# Altium PCB CAN.PcbDoc
Units mil, origin at the board's own origin, x right, y up, seen from the top; angles counter-clockwise.
Board outline 2980 x 2445.03 mil, 2 copper layers (Top Layer, Bottom Layer), stack 61.756 mil thick; 48 components, 33 nets, 223 pads, 20 vias.
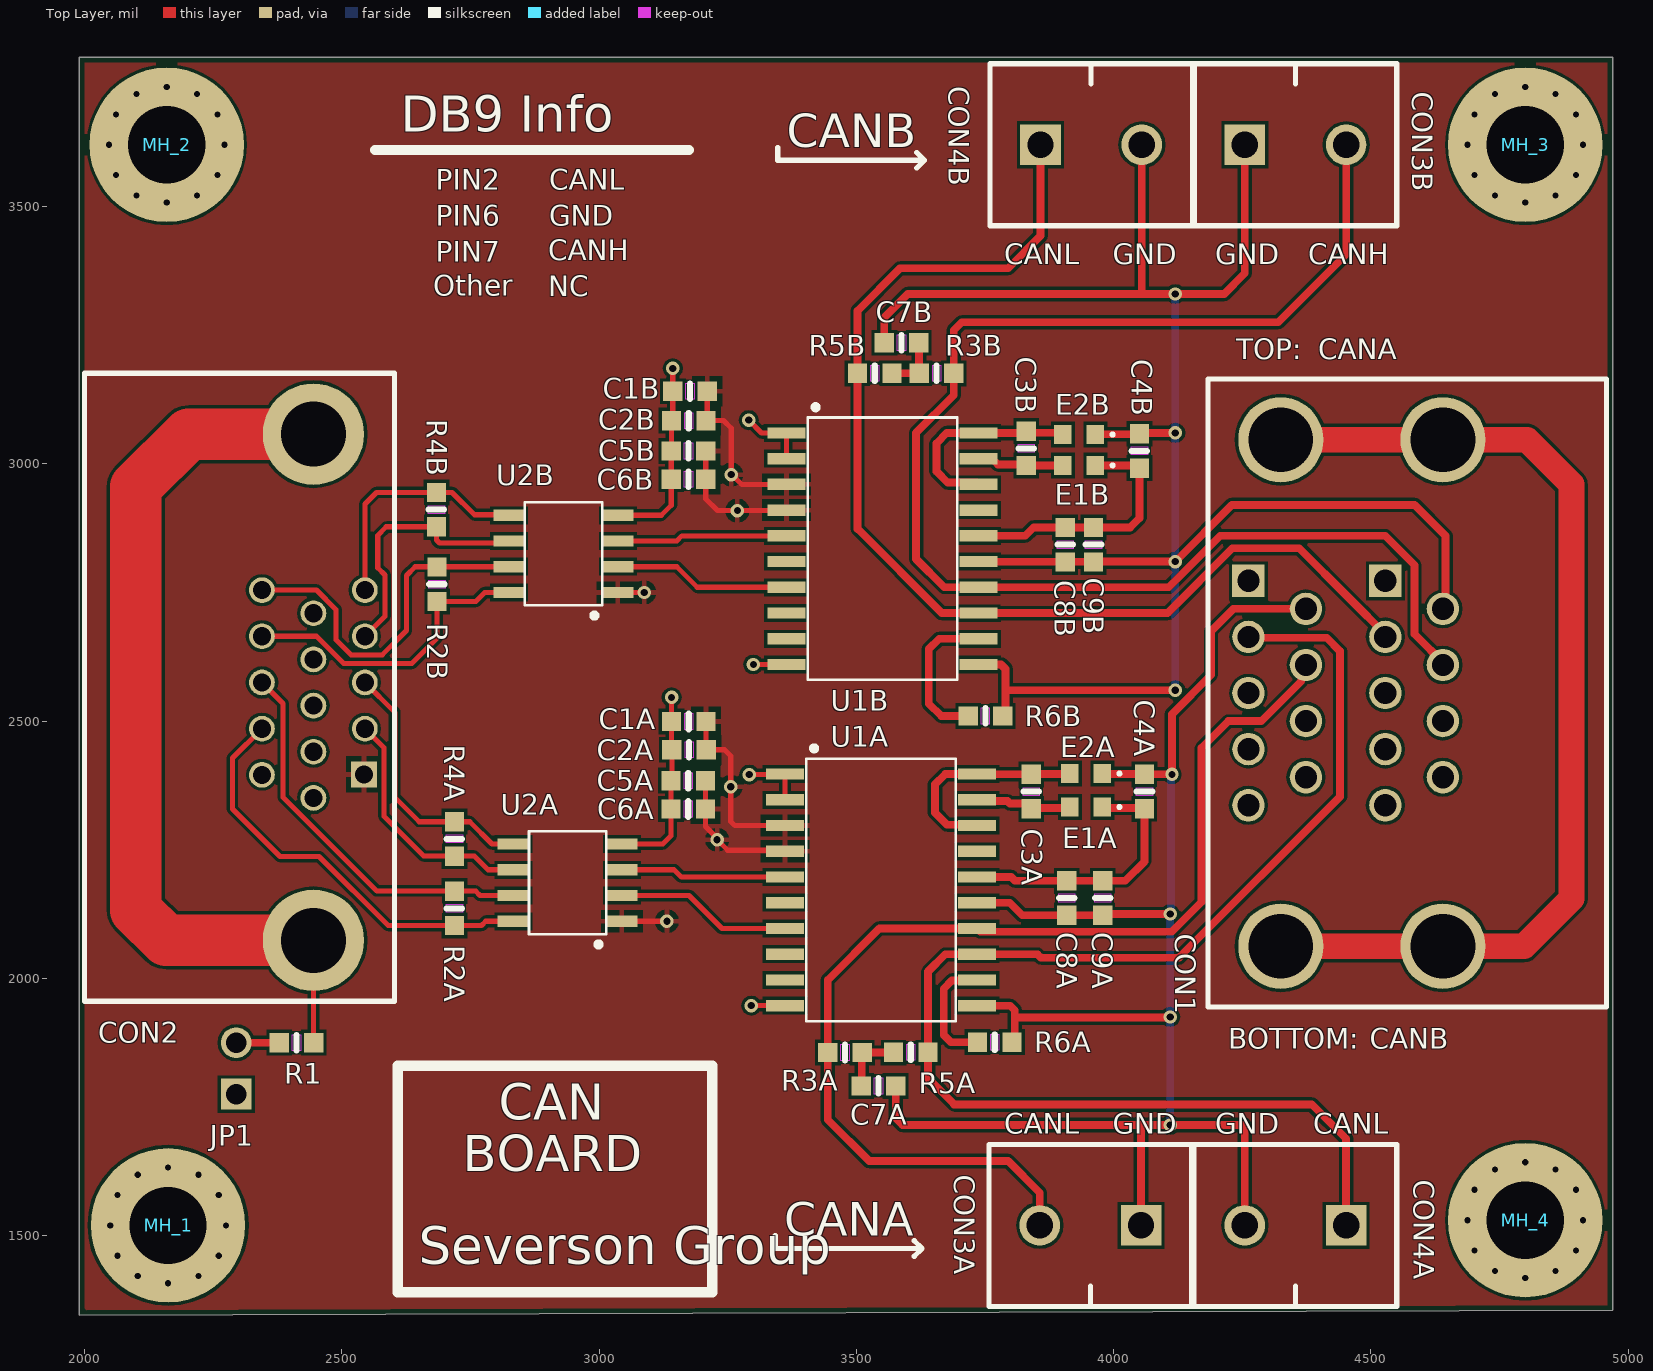
[diagram p0: Top Layer view]
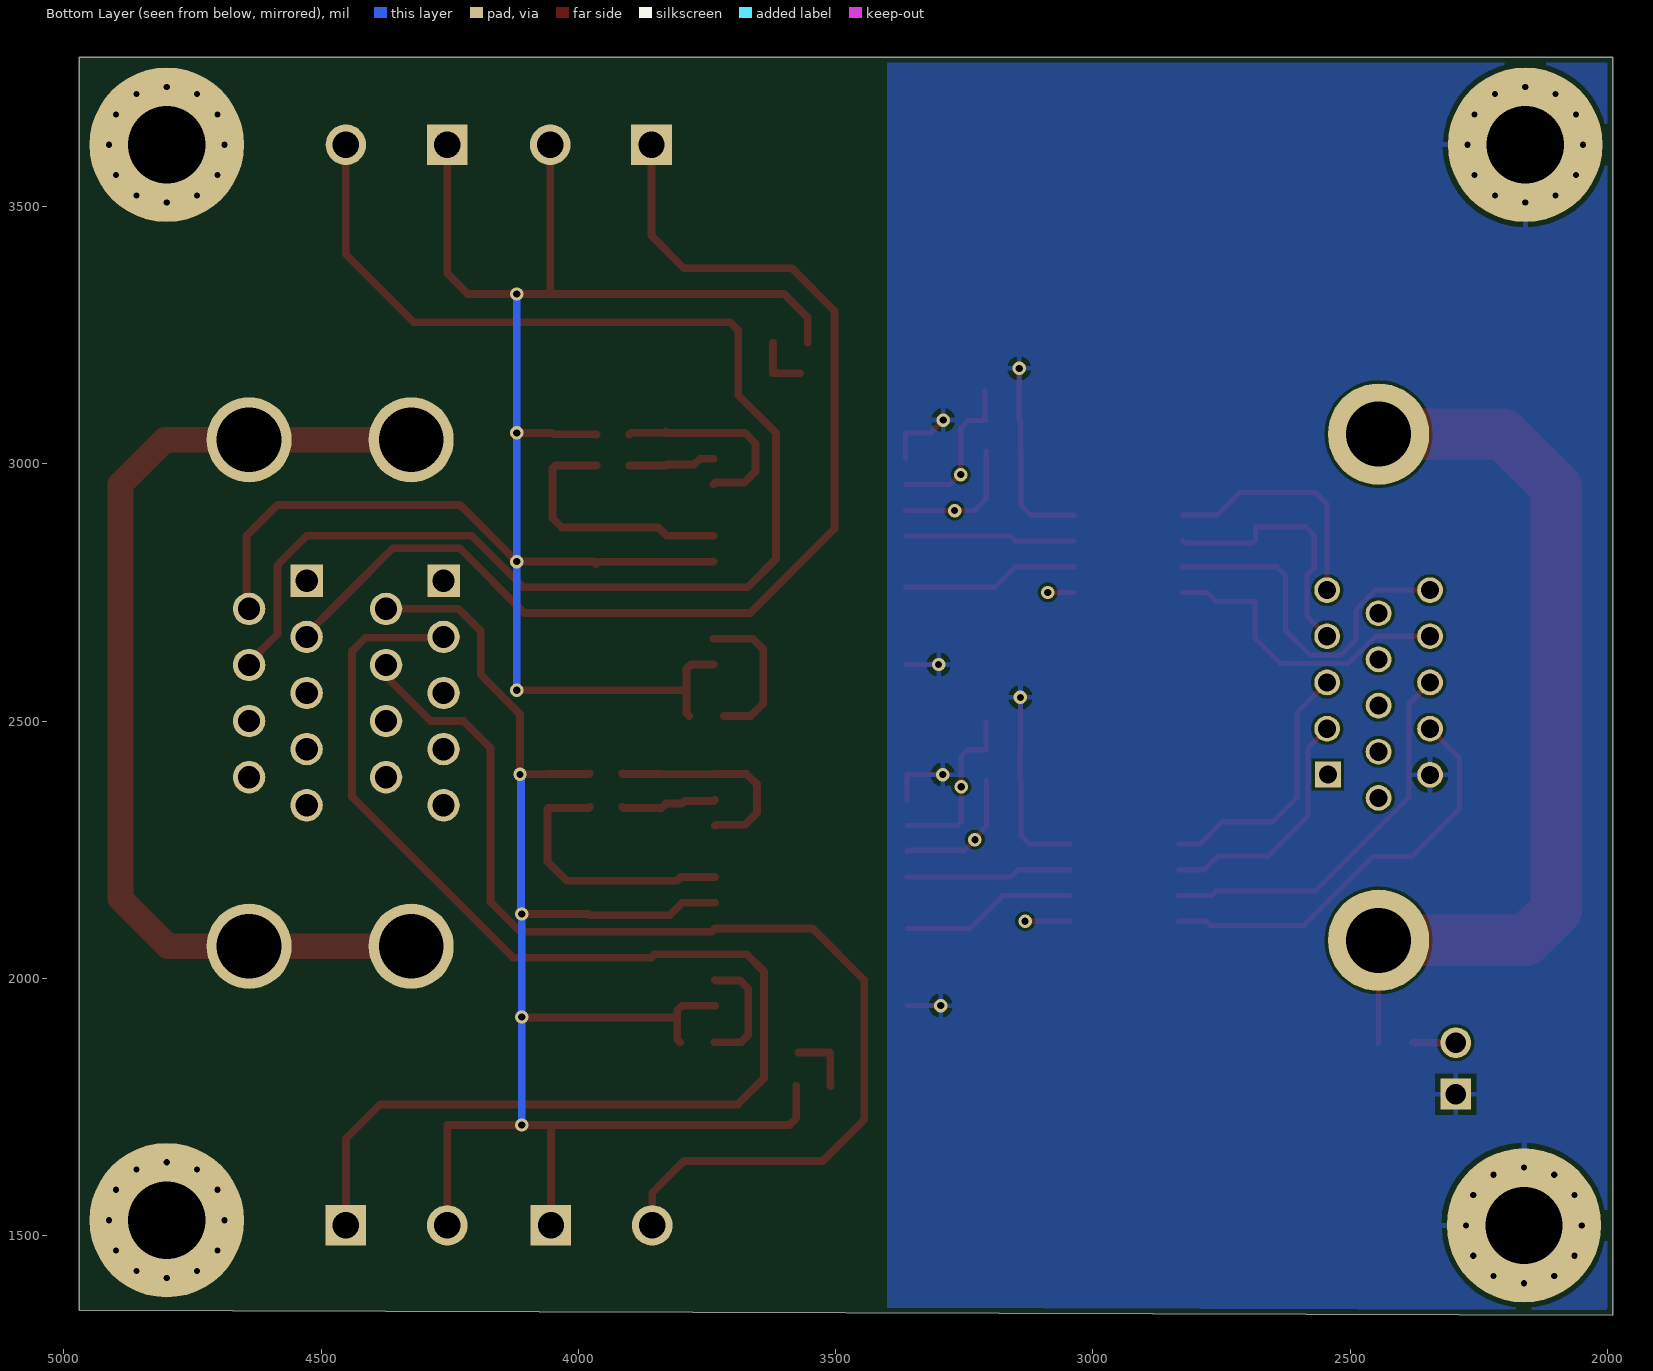
[diagram p1: Bottom Layer view, seen from below]
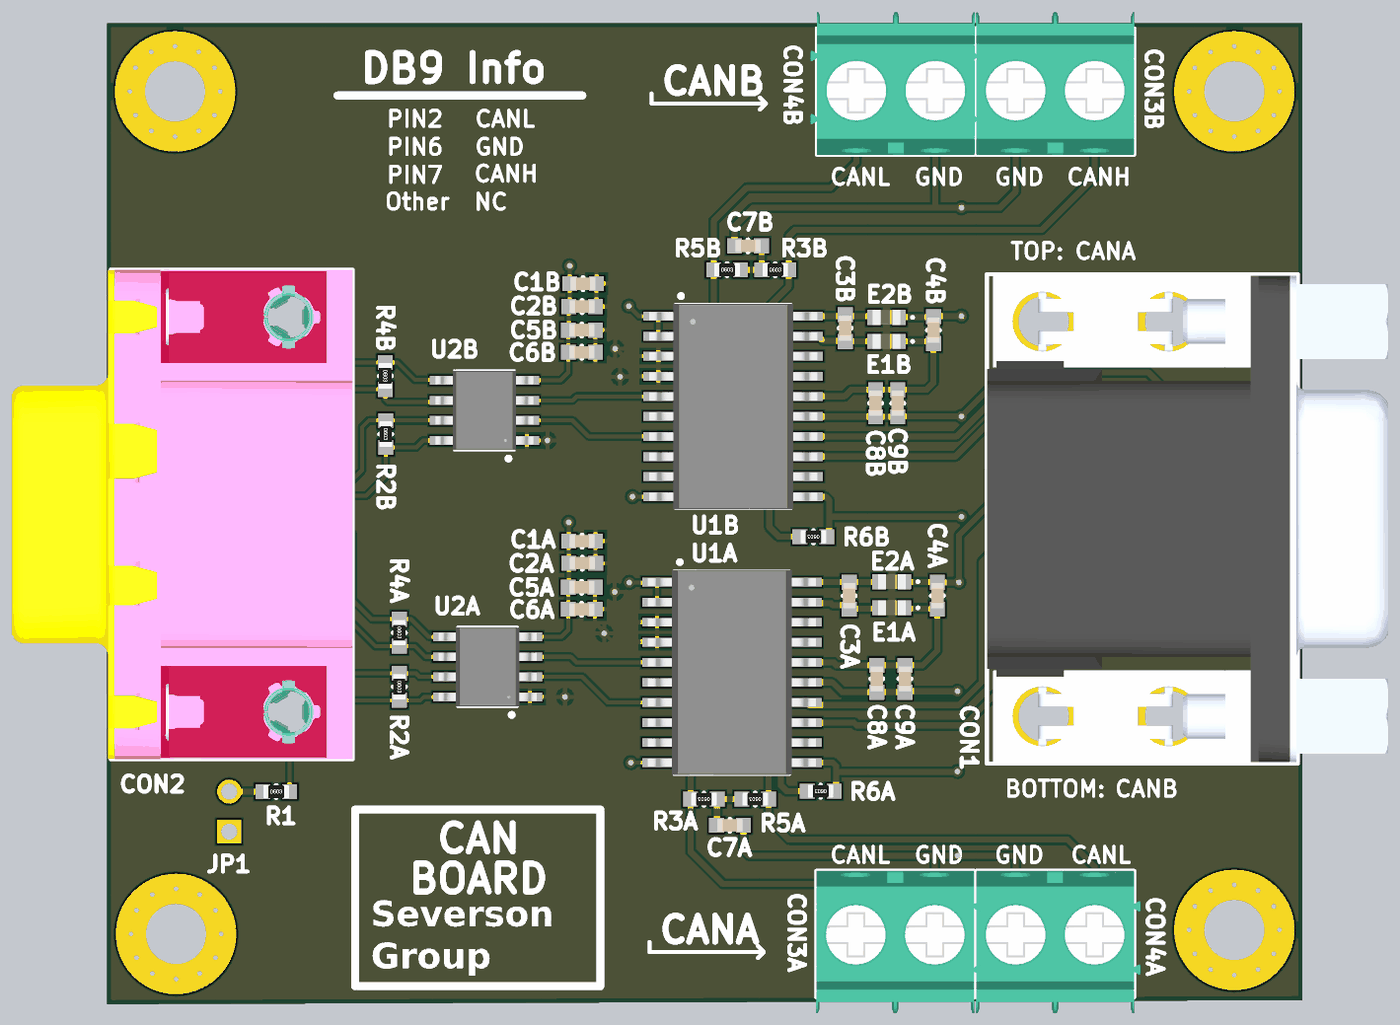
[diagram p2: 3D render of the assembled board from above, using the file's embedded part models]

## Layer stack, top to bottom
Top Solder: solder mask 1, SM-001, Dk 4
Top Layer: signal copper 1.378
Dielectric 1: core 59, Core-043, Dk 4.3
Bottom Layer: signal copper 1.378
Bottom Solder: solder mask 1, SM-001, Dk 4

## Board outline
1990,1344.97 1990,3790 4960,3790 4970,3790 4970,1354.97

## Design rules (kind name [scope] priority, off if disabled: settings)
BoardOutlineClearance [All] p1: gap=10 ignorepadtopadclearanceinfootprint=FALSE
Clearance Clearance_1 [InNamedPolygon('NONET_L02_P007')] p1: gap=10 ignorepadtopadclearanceinfootprint=FALSE except(0: Arc-Hole Track-Hole SMDPad-Hole THPad-Hole Via-Hole Fill-Hole Poly-Hole Region-Hole Text-Hole)
Clearance [All] p2: gap=6 ignorepadtopadclearanceinfootprint=FALSE
Height [All] p1: minheight=0 maxheight=5000 prefheight=500
HoleSize [All] p1: absolutevalues=TRUE maxlimit=250 minlimit=14 maxpercent=80.000 minpercent=20.000
MinimumSolderMaskSliver [All] p1: minsoldermaskwidth=6
PolygonConnect [All] p1: connectstyle=Relief reliefconductorwidth=10 reliefentries=4 polygonreliefangle="90 Angle" airgapwidth=10
RoutingVias [All] p1: holewidth=14 width=26 viastyle="Through Hole" minholewidth=12 minwidth=18 maxholewidth=150 maxwidth=200
SolderMaskExpansion [All] p1: expansion=4 istentingtop=FALSE
Width [All] p1: maxlimit=100 minlimit=6 preferedwidth=6
27 further rules are at their usual default settings.

## Classes and differential pairs
component class U_BackPage: MH_1 MH_2 MH_3 MH_4 SCREW1 SCREW2 SCREW3 SCREW4 STANDOFF1 STANDOFF2 STANDOFF3 STANDOFF4
channel class CAN_Transceiver: CAN_TransceiverA CAN_TransceiverB
component class CAN_TransceiverB: C1B C2B C3B C4B C5B C6B C7B C8B C9B CON3B CON4B E1B E2B R2B R3B R4B R5B R6B U1B U2B
component class CAN_TransceiverA: C1A C2A C3A C4A C5A C6A C7A C8A C9A CON3A CON4A E1A E2A R2A R3A R4A R5A R6A U1A U2A
component class CAN: CON1 CON2 JP1 R1

## Components (designator, comment, footprint, x,y, rotation, side; value= is the part's Value field where it differs from the comment)
C1A "Capacitor" 0603_CAP 3174.46,2499.25 r0 top value=10uF (schematic designator C1)
C1B "Capacitor" 0603_CAP 3176.87,3141 r0 top value=10uF (schematic designator C1)
C2A "Capacitor" 0603_CAP 3175,2444.25 r0 top value=0.1uF (schematic designator C2)
C2B "Capacitor" 0603_CAP 3174.49,3083.89 r0 top value=0.1uF (schematic designator C2)
C3A "Capacitor" 0603_CAP 3840,2363 r270 top value=0.1uF (schematic designator C3)
C3B "Capacitor" 0603_CAP 3830.25,3030 r270 top value=0.1uF (schematic designator C3)
C4A "Capacitor" 0603_CAP 4060,2363 r270 top value=10uF (schematic designator C4)
C4B "Capacitor" 0603_CAP 4050.25,3025 r270 top value=10uF (schematic designator C4)
C5A "Capacitor" 0603_CAP 3173.46,2384.25 r0 top value=0.1uF (schematic designator C5)
C5B "Capacitor" 0603_CAP 3173.87,3025 r0 top value=0.1uF (schematic designator C5)
C6A "Capacitor" 0603_CAP 3173.46,2329.25 r0 top value=0.01uF (schematic designator C6)
C6B "Capacitor" 0603_CAP 3173.87,2970 r0 top value=0.01uF (schematic designator C6)
C7A "Capacitor" 0603_CAP 3543.13,1791 r0 top value=4700pF (schematic designator C7)
C7B "Capacitor" 0603_CAP 3587.88,3235.2 r180 top value=4700pF (schematic designator C7)
C8A "Capacitor" 0603_CAP 3909,2156.13 r90 top value=0.01uF (schematic designator C8)
C8B "Capacitor" 0603_CAP 3906,2842.87 r90 top value=0.01uF (schematic designator C8)
C9A "Capacitor" 0603_CAP 3979,2156.13 r90 top value=0.1uF (schematic designator C9)
C9B "Capacitor" 0603_CAP 3961,2842.87 r90 top value=0.1uF (schematic designator C9)
CON1 "L17H2220131" L17H2220131 4640,2554.53 r90 top
CON2 "ICD15S13E6GX00LF" ICD15S 2445,2565.75 r270 top
CON3A "ScrewTerminal_1x2" 1935161 3955,1520 r180 top (schematic designator CON3)
CON3B "ScrewTerminal_1x2" 1935161 4353.57,3620 r0 top (schematic designator CON3)
CON4A "ScrewTerminal_1x2" 1935161 4353.43,1520 r180 top (schematic designator CON4)
CON4B "ScrewTerminal_1x2" 1935161 3956.43,3620 r0 top (schematic designator CON4)
E1A "BK1608LM182-T" BK0603_TAY 3946.45,2333 r180 top (schematic designator E1)
E1B "BK1608LM182-T" BK0603_TAY 3933.08,2996.9 r180 top (schematic designator E1)
E2A "BK1608LM182-T" BK0603_TAY 3946.45,2398 r180 top (schematic designator E2)
E2B "BK1608LM182-T" BK0603_TAY 3933.08,3056.9 r180 top (schematic designator E2)
JP1 "Jumper2" PIN_HEADER_1x2 2295,1825 r90 top
MH_1 "MOUNTING_HOLE" MOUNTING_HOLE 2162.5,1520 r0 top
MH_2 "MOUNTING_HOLE" MOUNTING_HOLE 2160,3620 r0 top
MH_3 "MOUNTING_HOLE" MOUNTING_HOLE 4800,3620 r0 top
MH_4 "MOUNTING_HOLE" MOUNTING_HOLE 4800,1530 r0 top
R1 "Resistor" 0603_RES 2412.13,1875 r0 top value=DNP
R2A "Resistor" 0603_RES 2719,2136 r270 top value=120 (schematic designator R2)
R2B "Resistor" 0603_RES 2685,2766 r270 top value=120 (schematic designator R2)
R3A "Resistor" 0603_RES 3478.13,1856 r180 top value=60.4 (schematic designator R3)
R3B "Resistor" 0603_RES 3656,3175.75 r0 top value=60.4 (schematic designator R3)
R4A "Resistor" 0603_RES 2719,2271 r270 top value=120 (schematic designator R4)
R4B "Resistor" 0603_RES 2684,2911 r270 top value=120 (schematic designator R4)
R5A "Resistor" 0603_RES 3605.99,1856.27 r180 top value=60.4 (schematic designator R5)
R5B "Resistor" 0603_RES 3536,3175.75 r0 top value=60.4 (schematic designator R5)
R6A "Resistor" 0603_RES 3769,1876 r180 top value=47k (schematic designator R6)
R6B "Resistor" 0603_RES 3751,2510 r180 top value=47k (schematic designator R6)
U1A "ADM3057EBRWZ" RW-20_ADI 3548,2172 r0 top (schematic designator U1)
U1B "ADM3057EBRWZ" RW-20_ADI 3551,2835 r0 top (schematic designator U1)
U2A "ST490ABDR" SO-8_STM 2939,2186 r180 top (schematic designator U2)
U2B "ST490ABDR" SO-8_STM 2931,2825 r180 top (schematic designator U2)

## Footprints (in the part's own frame and the unit in brackets; to place one, negate y for a bottom-side part, rotate by r counter-clockwise, add the part's x,y. Pads: shape width x height; smd on the part's side, far side on the other; paste and mask are expansions set on the pad)
0603_CAP [mm]
  rect 0.95x0.95 smd: 1(-0.85,0) 2(0.85,0)
  Top Layer keep-out region: -0.2,0.4 0.2,0.4 0.2,-0.4 -0.2,-0.4
  silkscreen extent 0,-0.38 0,0.38, body extent -0.8,-0.4 0.8,0.4, height 0.79
0603_RES [mm]
  rect 0.95x0.95 smd: 1(-0.85,0) 2(0.85,0)
  Top Layer keep-out region: -0.2,0.4 0.2,0.4 0.2,-0.4 -0.2,-0.4
  silkscreen extent 0,-0.38 0,0.38, body extent -0.8,-0.4 0.8,0.4, height 0.44
1935161 [mm] "TERM BLOCK PCB 2POS 5.0MM GREEN"
  rect 2x2 hole 1.3: 1(-2.5,0)
  round 2 hole 1.3: 2(2.5,0)
  silkscreen extent -5,-4 5,4, body extent -5.4,-4 5,5, height 11.5
BK0603_TAY [mm]
  rect 0.856x0.95 smd: 1(-0.803,0) 2(0.803,0)
  silkscreen extent -1.73,-0.08 -1.58,0.08, body extent -0.87,-0.47 0.88,0.48, height 0.95
ICD15S [mm] "CONN DSUB HD RCPT 15POS R/A SLDR"
  rect 1.27x1.27 hole 0.9: 1(4.305,2.5)
  round 1.27 hole 0.9: 2(2.045,2.54) 3(-0.235,2.54) 4(-2.515,2.54) 5(-4.795,2.54) 6(5.465,0) 7(3.185,0) 8(0.905,0) 9(-1.375,0) 10(-3.655,0) 11(4.325,-2.54) 12(2.045,-2.54) 13(-0.235,-2.54) 14(-2.515,-2.54) 15(-4.795,-2.54)
  round 5 hole 3.2: SH1(12.495,0) SH2(-12.495,0)
  silkscreen extent -15.5,-11.3 15.5,4, body extent -15.5,-17.58 15.5,4, height 12.65
L17H2220131 [mm]
  rect 1.6x1.6 hole 1.1: 1B(5.54,2.84) 1T(5.54,9.6)
  round 1.6 hole 1.1: 2B(2.77,2.84) 2T(2.77,9.6) 3B(0,2.84) 3T(0,9.6) 4B(-2.77,2.84) 4T(-2.77,9.6) 5B(-5.54,2.84) 5T(-5.54,9.6) 6B(4.155,0) 6T(4.155,6.76) 7B(1.385,0) 7T(1.385,6.76) 8B(-1.385,0) 8T(-1.385,6.76) 9B(-4.155,0) 9T(-4.155,6.76)
  round 4.2 hole 3.2: SH1(-12.5,8) SH2(-12.5,0) SH3(12.5,0) SH4(12.5,8)
  silkscreen extent -15.5,-8.08 15.5,11.6, body extent -15.4,-13.8 15.41,11.6, height 31.67
MOUNTING_HOLE [mil]
  round 30 hole 12: 1(-112.5,0) 1(-98.43,-59.06) 1(-98.43,59.06) 1(-59.06,-98.43) 1(-59.06,98.43) 1(0,-112.5) 1(0,112.5) 1(59.06,-98.43) 1(59.06,98.43) 1(98.43,-59.06) 1(98.43,59.06) 1(112.5,0)
  round 300 hole 150: 1(0,0)
PIN_HEADER_1x2 [mil]
  rect 60x60 hole 40.16: 1(-50,0)
  round 60 hole 40.16: 2(50,0)
RW-20_ADI [mil]
  rect 74x22 smd: 1(-186.5,225) 2(-186.5,175) 3(-186.5,125) 4(-186.5,75) 5(-186.5,25) 6(-186.5,-25) 7(-186.5,-75) 8(-186.5,-125) 9(-186.5,-175) 10(-186.5,-225) 11(186.5,-225) 12(186.5,-175) 13(186.5,-125) 14(186.5,-75) 15(186.5,-25) 16(186.5,25) 17(186.5,75) 18(186.5,125) 19(186.5,175) 20(186.5,225)
  silkscreen extent -145,-255 145,280, body extent -209,-256 209,256, height 104
SO-8_STM [mil]
  rect 61x22 smd: 1(-105.5,75) 2(-105.5,25) 3(-105.5,-25) 4(-105.5,-75) 5(105.5,-75) 6(105.5,-25) 7(105.5,25) 8(105.5,75)
  silkscreen extent -75,-100 75,125, body extent -122,-98 122,99, height 69

## Part data
C1A C1B C4A C4B: Supplier Part Number 1=490-18214-1-ND, Supplier 1=Digi-Key
C2A C2B C3A C3B C5A C5B C9A C9B: Supplier Part Number 1=1292-1390-1-ND, Supplier 1=Digi-Key
C6A C6B C8A C8B: Supplier Part Number 1=399-8985-1-ND, Supplier 1=Digi-Key
C7A C7B: Supplier Part Number 1=399-9087-1-ND, Supplier 1=Digi-Key
CON1: "CONN D-SUB RCPT 9POS R/A SLDR", Supplier Part Number 1=L17H2220131-ND, Supplier Part 1=Digi-Key
CON2: "CONN DSUB HD RCPT 15POS R/A SLDR", Supplier Part Number 1=609-2801-ND, Supplier 1=Digi-Key
CON3A CON3B CON4A CON4B: Supplier Part Number 1=277-1667-ND, Supplier 1=Digi-Key
E1A E1B E2A E2B: "FERRITE BEAD 1.8 KOHM 0603 1LN", Supplier Part Number 1=587-1892-1-ND, Supplier 1=Digi-Key
JP1: Supplier Part Number 1=732-5315-ND, Supplier 1=Digi-Key
R1: Supplier Part Number 1=P0.0GDKR-ND, Supplier 1=Digi-Key
R2A R2B R4A R4B: Supplier Part Number 1=311-120HRCT-ND, Supplier 1=Digi-Key
R3A R3B R5A R5B: Supplier Part Number 1=541-5507-1-ND, Supplier 1=Digi-Key
R6A R6B: Supplier Part Number 1=541-47.0KHCT-ND, Supplier 1=Digi-Key
U1A U1B: "Transceiver, Isolated 20-SOIC", Supplier Part Number 1=ADM3057EBRWZ-ND, Supplier 1=Digi-Key
U2A U2B: "1/1 Transceiver Full RS422, RS485 8-SO", Supplier Part Number 1=497-2091-1-ND, Supplier 1=Digi-Key

## Via types
v1: diameter 26, hole 14, Top Layer to Bottom Layer, tented both sides, 20 vias

## Nets (pads, with @x,y where several pads share a name; then routed paths per layer and width w, separated by ;. In a path a pad name is that pad's centre, name@x,y a point inside that pad or via, vN(x,y) a via of type N, cw(c..) or ccw(c..) an arc to the next point about the centre after c; other vN are vias at no path point)
5V: C1A.2 C1B.2 C2A.2 C2B.2 C5A.2 C5B.2 C6A.2 C6B.2 CON2.1 U1A.3 U1A.4 U1B.3 U1B.4 U2A.1 U2B.1 | length 1327.1
  Top Layer w10: U2B.1 v1(3088,2750) ; U2A.1 v1(3132,2111) ; C5A.2 C6A.2 3206.93,2295.07 3229.46,2272.54 v1(3229.46,2269.54) 3250,2249 3359.5,2249 U1A.4 ; C5B.2 C6B.2 3207.34,2931.66 3230,2909 v1(3269,2909) 3269.5,2909.5 3364,2909.5 U1B.4 ; C1A.2 3207.93,2444.79 C2A.2 3243.75,2444.25 3256,2432 v1(3256,2372.5) 3256,2305 3264,2297 U1A.3 ; C1B.2 3210.34,3086.28 C2B.2 3242.11,3083.89 3257,3069 v1(3257,2979) 3258.6,2979 3277.6,2960 U1B.3
CANHA: CON1.7T CON3A.2 R3A.2 U1A.14 | length 2182.2
  Top Layer w15: CON3A.2 3856.57,1583.42 3795,1645 3525,1645 3444.66,1725.34 R3A.2 3444.66,1996.66 3545,2097 U1A.14 3741.04,2090.46 4112.94,2090.46 4171,2148.52 4171,2448 4223,2500 4287,2500 4364.68,2577.68 4364.68,2599.87 CON1.7T
CANHB: CON1.7B CON3B.2 R3B.2 U1B.14 | length 2787.1
  Top Layer w15: CON3B.2 4452,3407 4320,3275 3705,3275 3689.46,3259.46 R3B.2 3689.46,3133.46 3616,3060 3616,2815 3671,2760 U1B.14 4107.48,2760 4207.48,2860 4527.91,2860 4585,2802.91 4585,2669.06 CON1.7B@4645,2609.06
CANLA: CON1.2T CON4A.1 R5A.1 U1A.13 | length 2651.5
  Top Layer w15: CON1.2T@4267.05,2663.58 4268.63,2662 4414,2662 4440,2636 4440,2353 4127,2040 3859,2040 3852,2047 U1A.13 3673,2047 3639.45,2013.45 R5A.1 3639.45,1805.55 3690,1755 4385,1755 4451.85,1688.15 CON4A.1
CANLB: CON1.2B CON4B.1 R5B.1 U1B.13 | length 2238.8
  Top Layer w15: CON4B.1 3858,3443 3795,3380 3585,3380 3502.54,3297.54 R5B.1 3502.54,2873.46 3666,2710 U1B.13 4105,2710 4231,2836 4360.77,2836 4456.5,2740.27 CON1.2B@4533.19,2663.58
GND: C1A.1 C1B.1 C2A.1 C2B.1 C5A.1 C5B.1 C6A.1 C6B.1 CON2.11 JP1.1 MH_1.1 MH_2.1 U1A.1 U1A.2 U1A.10 U1B.1 U1B.2 U1B.10 U2A.4 U2B.4 | length 1134.9
  Top Layer w10: U2B.4 3121,2900 3140.41,2919.41 C6B.1 C5B.1 3141.02,3025.61 C2B.1 3143.41,3086.28 C1B.1 v1(3143.41,3185.41) ; U2A.4 3124,2261 3140,2277 C6A.1 C5A.1 3141.54,2385.79 C2A.1 3141,2444.79 C1A.1 v1(3141,2546) ; v1(3291,3085) 3316,3060 U1B.1 U1B.2 ; v1(3292,2396) 3360.5,2396 U1A.1 U1A.2 ; v1(3296,1947) U1A.10 ; v1(3300,2610) U1B.10
GND2A: C4A.1 C7A.2 C8A.1 C9A.1 CON1.6T CON3A.1 CON4A.2 E2A.1 R6A.1 U1A.11 U1A.15 | length 3304.5
  Top Layer w15: C7A.2 3576.59,1728.41 3590,1715 4050,1715 ; U1A.11 3799.21,1947 3808,1938.21 3808,1924.04 ; U1A.15 3798,2147 3822.34,2122.66 C8A.1 C9A.1 3981.34,2125 v1(4110,2125) ; R6A.1 3808,1881.54 3808,1924.04 ; E2A.1 3978.82,2397.23 4059.23,2397.23 C4A.1 v1(4113.54,2396.46) 4113.54,2513.54 4190,2590 4190,2675 4233.11,2718.11 CON1.6T@4378.86,2718.11 ; CON3A.1 4053.43,1711.58 4050,1715 ; v1(4110,1925) 4109.04,1924.04 3808,1924.04 ; CON4A.2 4255,1715 v1(4110,1715) 4050,1715
  Bottom Layer w15: v1(4110,1715) v1(4110,1925) v1(4110,2125) 4111.77,2126.77 4111.77,2394.7 v1(4113.54,2396.46)
GND2B: C4B.1 C7B.2 C8B.1 C9B.1 CON1.6B CON3B.1 CON4B.2 E2B.1 R6B.1 U1B.11 U1B.15 | length 3856.2
  Top Layer w15: C7B.2 3554.42,3284.42 3600,3330 4055,3330 ; U1B.11 3781.21,2610 3790,2601.21 3790,2558.37 ; U1B.15 3737.8,2809.7 3905.7,2809.7 C8B.1 C9B.1 3965.41,2805 3970.41,2810 v1(4120,2810) 4230,2920 4585,2920 4645,2860 CON1.6B@4645,2718.11 ; R6B.1 3790,2515.54 3790,2558.37 ; E2B.1 3965.47,3057.68 4049.47,3057.68 C4B.1 4051.79,3060 v1(4120,3060) ; CON4B.2 4055,3619.85 4055,3330 ; v1(4120,2560) 3791.63,2560 3790,2558.37 ; CON3B.1 4255.15,3370.15 4215,3330 v1(4120,3330) 4055,3330
  Bottom Layer w15: v1(4120,2560) v1(4120,2810) v1(4120,3330)
NetC3A_1: C3A.1 E2A.2 U1A.18 U1A.20 | length 417.8
  Top Layer w15: U1A.18 3732.84,2298.66 3676.34,2298.66 3653,2322 3653,2377 3673,2397 U1A.20 3734.77,2396.73 3839.73,2396.73 C3A.1 3840.77,2397.23 3914.07,2397.23 E2A.2
NetC3A_2: C3A.2 E1A.2 U1A.19 | length 189
  Top Layer w15: U1A.19 3736.98,2344.52 3794,2344.52 3798.8,2339.72 3829.82,2339.72 C3A.2 3841.73,2331.27 3913.11,2331.27 E1A.2
NetC3B_1: C3B.1 E2B.2 U1B.18 U1B.20 | length 404.8
  Top Layer w15: U1B.18 3734,2963.5 3677.5,2963.5 3656,2985 3656,3040 3676,3060 3826.79,3060 C3B.1 3833.53,3060.18 3898.19,3060.18 E2B.2
NetC3B_2: C3B.2 E1B.2 U1B.19 | length 169.7
  Top Layer w15: U1B.19 3763.5,3010 3774.7,2998.8 3827.99,2998.8 C3B.2 3830.43,2996.72 3901.29,2996.72 E1B.2
NetC7A_1: C7A.1 R3A.1 R5A.2 | length 126.8
  Top Layer w15: C7A.1 3510.63,1791.96 3510.63,1855.04 R3A.1 3511.73,1856.14 3572.39,1856.14 R5A.2
NetC7B_1: C7B.1 R3B.1 R5B.2 | length 113
  Top Layer w15: R5B.2 R3B.1 3621.94,3176.34 3621.94,3234.6 C7B.1
NetJP1_2: JP1.2 R1.1 | length 83.7
  Top Layer w15: JP1.2 R1.1
NetR6A_2: R6A.2 U1A.12 | length 232.9
  Top Layer w15: U1A.12 3733.34,1995.84 3685.84,1995.84 3670,1980 3670,1890 3684,1876 R6A.2
NetR6B_2: R6B.2 U1B.12 | length 297.3
  Top Layer w15: R6B.2 3665,2510 3641,2534 3641,2640 3661,2660 U1B.12
NetU1A_5: U1A.5 U2A.3 | length 322.8
  Top Layer w10: U2A.3 3146,2211 3160,2197 U1A.5
NetU1A_7: U1A.7 U2A.2 | length 343.5
  Top Layer w10: U2A.2 3175,2161 3239,2097 U1A.7
NetU1B_5: U1B.5 U2B.3 | length 332.1
  Top Layer w10: U2B.3 3151,2850 3161,2860 U1B.5
NetU1B_7: U1B.7 U2B.2 | length 344.6
  Top Layer w10: U2B.2 3151,2800 3191,2760 U1B.7
SH_CAN: CON2.SH1 CON2.SH2 R1.2 | length 1778.5
  Top Layer w10: CON2.SH1 2445,1875.59 R1.2
  Top Layer w100: CON2.SH1 2158.58,2073.82 2100,2132.4 2100,2955 2202.68,3057.68 CON2.SH2
SH_ENC: CON1.SH1 CON1.SH2 CON1.SH3 CON1.SH4 | length 2010.3
  Top Layer w15: CON1.SH3 CON1.SH3@4640.77,3047.42
  Top Layer w50: CON1.SH1 CON1.SH2 4640.28,2062.68 4797.68,2062.68 4890,2155 4890,2960 4803.35,3046.65 CON1.SH3 CON1.SH4
SPI1_IN_N: CON2.3 R4A.1 U2A.5 | length 515.2
  Top Layer w10: CON2.3 2603,2517 2603,2352 2650.54,2304.46 R4A.1 2748.73,2304.46 2792.2,2261 U2A.5
SPI1_IN_P: CON2.2 R4A.2 U2A.6 | length 480.1
  Top Layer w10: CON2.2 2582,2448.24 2582,2315 2659.46,2237.54 R4A.2 2757.46,2237.54 2784,2211 U2A.6
SPI1_OUT_N: CON2.13 R2A.1 U2A.7 | length 770.1
  Top Layer w10: CON2.13 2345,2569 2351,2569 2386,2534 2386,2352 2568.54,2169.46 R2A.1 2760.54,2169.46 2769,2161 U2A.7
SPI1_OUT_P: CON2.12 R2A.2 U2A.8 | length 822.7
  Top Layer w10: CON2.12 2288,2428.24 2288,2329 2380,2237 2456,2237 2590.46,2102.54 R2A.2 2771.54,2102.54 2780,2111 U2A.8
SPI2_IN_N: CON2.5 R4B.1 U2B.5 | length 476.5
  Top Layer w10: CON2.5 2546,2755.53 2545,2756.53 2545,2922 2567.46,2944.46 R4B.1 2714.54,2944.46 2758,2901 2824.5,2901 U2B.5
SPI2_IN_P: CON2.4 R4B.2 U2B.6 | length 510.4
  Top Layer w10: CON2.4 2584,2703.76 2584,2784 2569.91,2798.09 2569.91,2860.91 2586.54,2877.54 R4B.2 2684,2851.86 2689.86,2846 2821.5,2846 U2B.6
SPI2_OUT_N: CON2.15 R2B.1 U2B.7 | length 703.4
  Top Layer w10: CON2.15 2348.53,2751 2352.06,2754.53 2451.03,2754.53 2489,2716.56 2489,2658 2518.24,2628.76 2578.76,2628.76 2626,2676 2626,2783 2643,2800 2685,2800 U2B.7
SPI2_OUT_P: CON2.14 R2B.2 U2B.8 | length 603.3
  Top Layer w10: CON2.14 2347.24,2667 2349.47,2664.76 2451.03,2664.76 2503.79,2612 2636,2612 2685,2661 R2B.2 2760.54,2732.54 2778,2750 U2B.8
VISOINA: C4A.2 C8A.2 C9A.2 E1A.1 U1A.16 | length 530
  Top Layer w15: U1A.16 3801,2197 3808.41,2189.59 C8A.2 C9A.2 4022.59,2189.59 4060,2227 C4A.2 4058.27,2331.27 3979.79,2331.27 E1A.1
VISOINB: C4B.2 C8B.2 C9B.2 E1B.1 U1B.16 | length 512
  Top Layer w15: U1B.16 3828.33,2860 3844.67,2876.34 C8B.2 C9B.2 4032.34,2876.34 4050.25,2894.25 C4B.2 4044.89,2996.9 E1B.1
pads on no net: CON1.1B CON1.1T CON1.3B CON1.3T CON1.4B CON1.4T CON1.5B CON1.5T CON1.8B CON1.8T CON1.9B CON1.9T CON2.6 CON2.7 CON2.8 CON2.9 CON2.10 MH_3.1 MH_4.1 U1A.6 U1A.8 U1A.9 U1A.17 U1B.6 U1B.8 U1B.9 U1B.17

## Polygon pours and split planes (outlines as drawn)
5V on Top Layer "5V_L01_P005" (solid, pour order 5): 1990,3790 4970,3790 4970,1355 4960,1345 1990,1345
GND on Bottom Layer "GND_L02_P011" (solid, pour order 11): 1990,3790 3400,3790 3400,1354.97 1990,1354.97

## Silkscreen, mask and mechanical layers (free items; w line width, h text height)
Top Overlay:
  lines w10: 3342.5,1500 3342.5,1475 3627.5,1475 ; 3347.5,3615 3347.5,3590 3632.5,3590 ; 3612.5,1460 3627.5,1475 ; 3612.5,1490 3627.5,1475 ; 3617.5,3575 3632.5,3590 ; 3617.5,3605 3632.5,3590
  lines w20: 2565,3610 3175,3610 ; 2608.83,1390 2792.87,1390 3160.96,1390 3220,1390 3220,1830 2608.83,1830 2608.83,1390
  text "DB9 Info" at 2615,3645 h70
  text "CANB" at 3365,3615 h65
  text "PIN2" at 2683,3533 h40
  text "CANL" at 2903,3533 h40
  text "PIN6" at 2683,3463 h40
  text "GND" at 2903,3463 h40
  text "CANH" at 2901,3396 h40
  text "PIN7" at 2683,3393 h40
  text "CANL" at 3788,3388 h40
  text "GND" at 3998,3388 h40
  text "GND" at 4198,3388 h40
  text "CANH" at 4378,3388 h40
  text "Other" at 2678.24,3326.59 h40
  text "NC" at 2901,3326 h40
  text "TOP:" at 4238,3203 h40
  text "CANA" at 4398,3203 h40
  text "BOTTOM:" at 4223,1863 h40
  text "CANB" at 4498,1863 h40
  text "CAN" at 2805,1725 h70
  text "CANL" at 3788,1698 h40
  text "GND" at 3998,1698 h40
  text "GND" at 4198,1698 h40
  text "CANL" at 4388,1698 h40
  text "BOARD" at 2735,1625 h70
  text "CANA" at 3360,1500 h65
  text "Severson Group" at 2650,1420 h125
Mechanical 1:
  the board outline again, w1